# Altium PCB drive.PcbDoc
Units mm, origin at the board's own origin, x right, y up, seen from the top; angles counter-clockwise.
Board outline 29.81 x 30.08 mm, 2 copper layers (Top Layer, Bottom Layer); 44 components, 40 nets, 202 pads, 109 vias.
Unrouted connection lines stored in the file: 5.
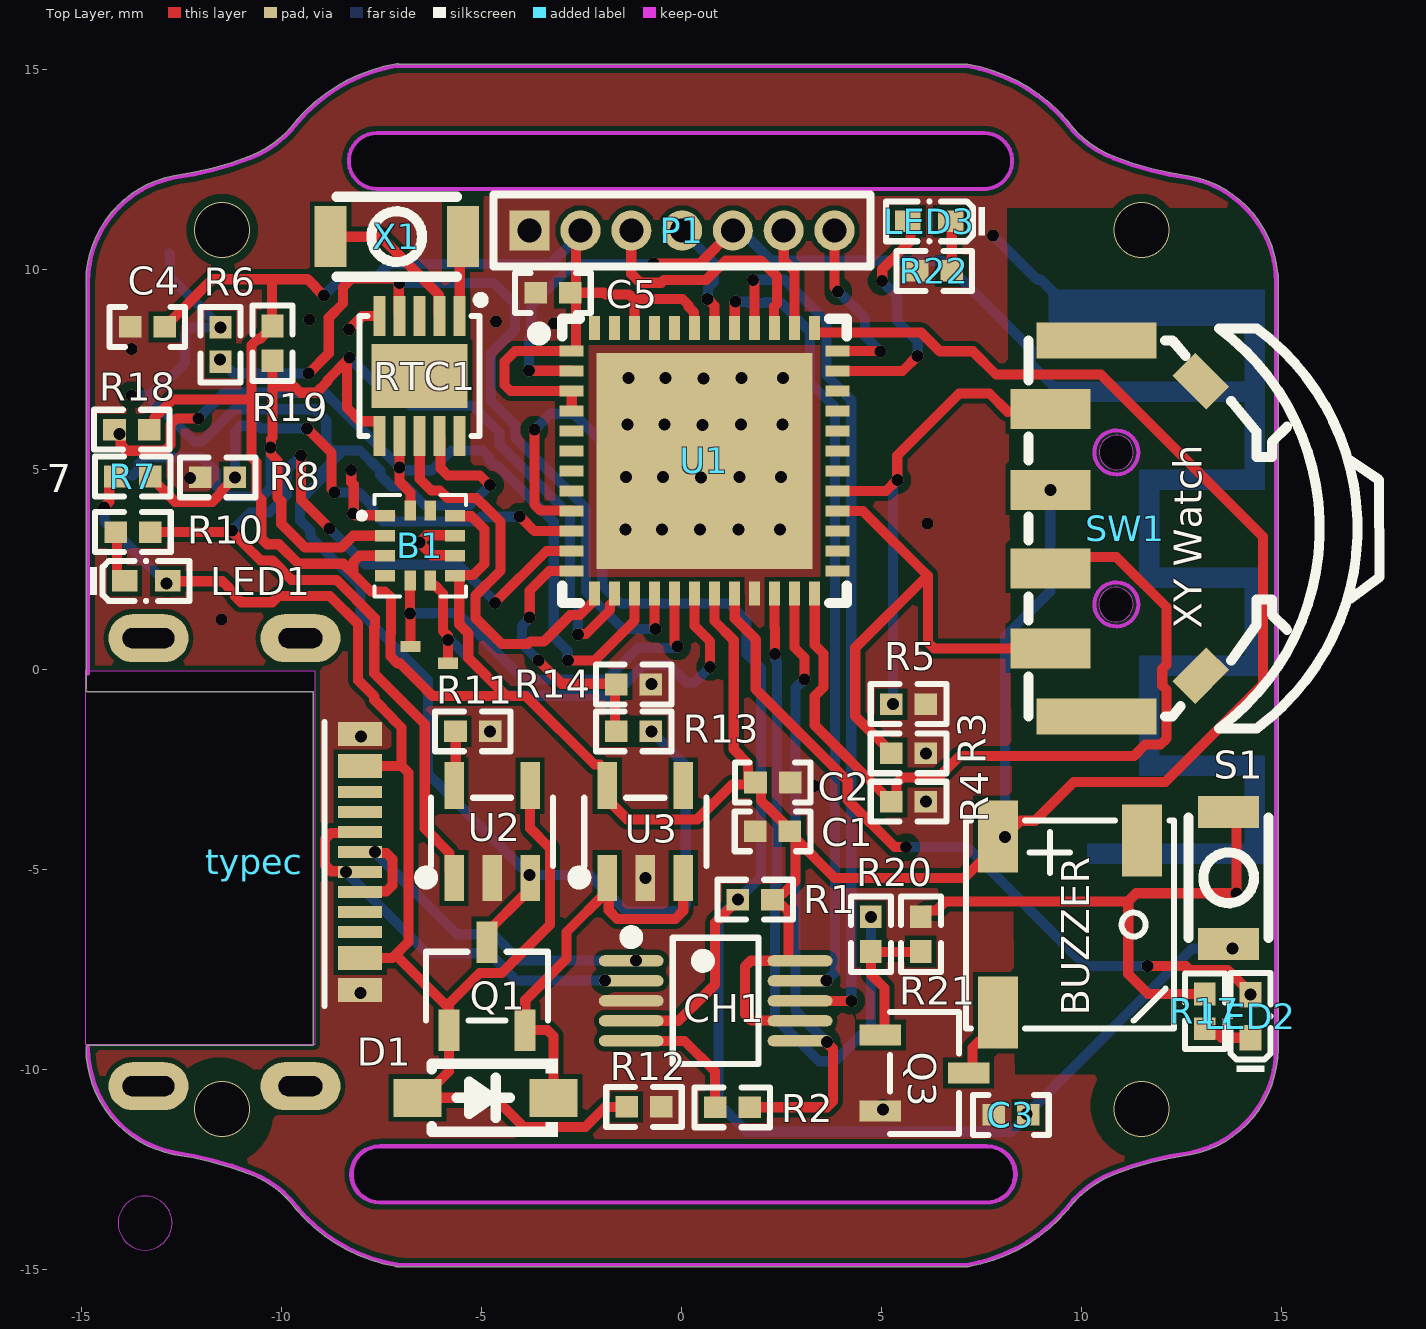
[diagram p0: Top Layer view]
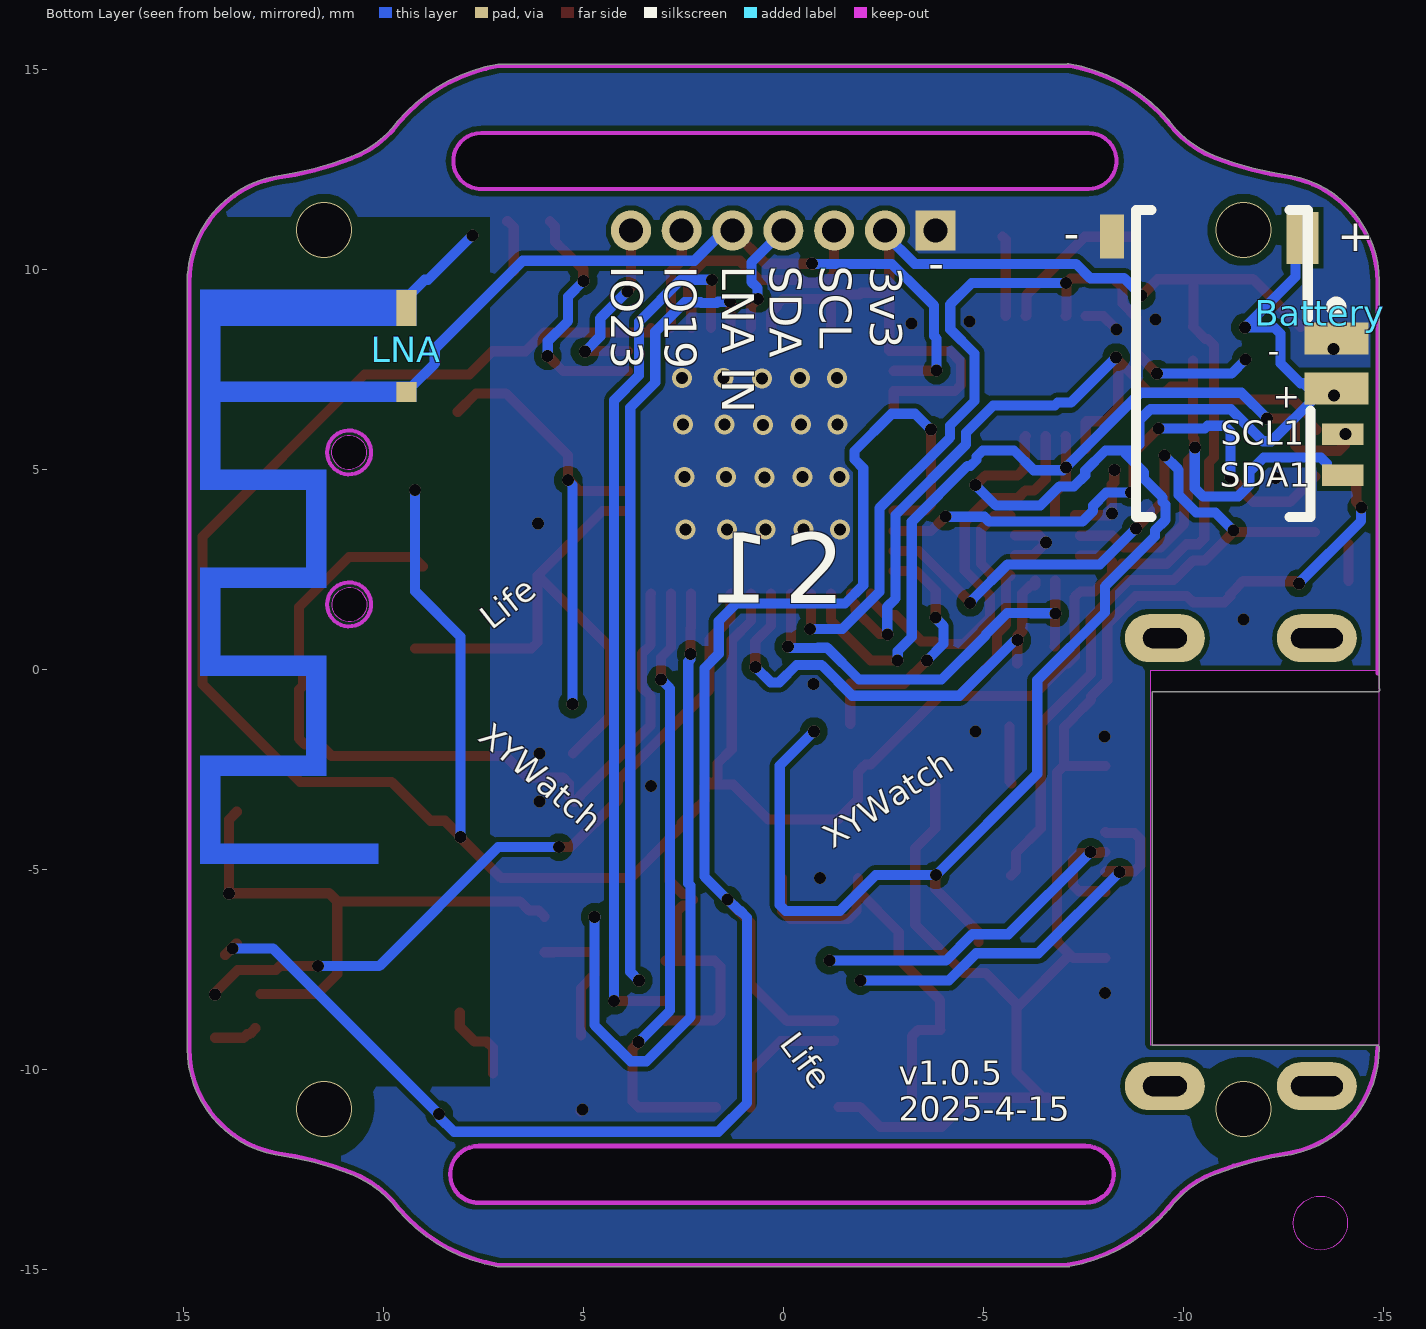
[diagram p1: Bottom Layer view, seen from below]

## Layer stack, top to bottom
Top Solder: solder mask 0.0102, Solder Resist, Dk 3.5
Top Layer: signal copper 0.0356
Dielectric 1: dielectric 0.32, FR-4, Dk 4.8
Bottom Layer: signal copper 0.0356
Bottom Solder: solder mask 0.0102, Solder Resist, Dk 3.5

## Board outline
-12.682,-12.128 cw(c-12.682,-12.128) -12.682,-12.128 cw(c-13.843,-20.451) -10.799,-12.619 ccw(c-10.78,-12.57) -10.797,-12.619 cw(c-11.691,-15.003) -9.636,-13.499 ccw(c-9.596,-13.47) -9.634,-13.503 cw(c-9.601,-13.475) -9.634,-13.502 -9.634,-13.503 ccw(c-6.425,-10.771) -7.147,-14.923 ccw(c-7.111,-14.887) -7.111,-14.938 7.132,-14.938 ccw(c7.132,-14.887) 7.157,-14.931 ccw(c6.445,-10.777) 9.649,-13.515 ccw(c9.619,-13.475) 9.659,-13.505 cw(c11.714,-15.009) 10.82,-12.624 cw(c10.828,-12.644) 10.821,-12.624 10.822,-12.624 cw(c13.866,-20.456) 12.695,-12.135 ccw(c12.696,-12.085) 12.705,-12.134 ccw(c12.199,-9.472) 14.909,-9.472 ccw(c12.411,-9.471) 14.909,-9.453 14.909,9.652 ccw(c12.199,9.67) 14.909,9.67 ccw(c12.411,9.671) 14.909,9.688 14.909,9.872 ccw(c14.859,9.872) 14.899,9.902 ccw(c12.199,9.67) 12.705,12.333 ccw(c12.696,12.283) 12.702,12.333 ccw(c12.705,12.347) 12.703,12.333 12.702,12.333 cw(c13.864,20.656) 10.819,12.824 ccw(c10.805,12.788) 10.818,12.824 cw(c11.711,15.208) 9.657,13.704 ccw(c9.618,13.676) 9.654,13.707 ccw(c6.445,10.976) 7.147,15.131 ccw(c7.132,15.083) 7.132,15.134 -7.085,15.134 ccw(c-7.115,15.093) -7.123,15.142 ccw(c-6.428,10.986) -9.637,13.717 ccw(c-9.628,13.709) -9.637,13.717 ccw(c-9.599,13.685) -9.64,13.714 cw(c-11.694,15.218) -10.8,12.834 cw(c-10.814,12.87) -10.801,12.834 -10.802,12.834 cw(c-10.786,12.795) -10.8,12.834 -10.802,12.834 cw(c-13.847,20.666) -12.685,12.343 cw(c-12.689,12.367) -12.686,12.343 -12.685,12.343 ccw(c-12.679,12.292) -12.688,12.343 ccw(c-12.181,9.68) -14.892,9.705 ccw(c-14.842,9.702) -14.892,9.702 -14.892,9.698 cw(c-13.337,9.689) -14.892,9.705 -14.892,9.698 ccw(c-12.181,9.68) -14.892,9.662 -14.892,-0.482 ccw(c-14.848,-0.507) -14.848,-0.558 -9.215,-0.558 -9.215,-9.397 -14.838,-9.397 ccw(c-14.838,-9.447) -14.889,-9.447 ccw(c-12.178,-9.465) -12.685,-12.128 ccw(c-12.676,-12.078)
cut-out: -14.09,-13.841 ccw(c-13.415,-13.841) -13.415,-14.516 ccw(c-13.415,-13.841) -12.74,-13.841 ccw(c-13.415,-13.841) -13.415,-13.166 ccw(c-13.415,-13.841)
cut-out: -7.547,-13.372 cw(c-7.547,-12.622) -7.547,-11.871 7.604,-11.871 cw(c7.604,-11.922) 7.619,-11.874 cw(c7.634,-11.922) 7.634,-11.871 cw(c7.634,-12.622) 8.385,-12.622 cw(c7.634,-12.622) 7.715,-13.368 cw(c7.694,-13.322) 7.694,-13.372
cut-out: -7.62,12.013 cw(c-7.62,12.713) -7.62,13.413 7.531,13.413 7.561,13.413 cw(c7.561,12.713) 7.561,12.013 7.621,12.013
cut-out: -14.892,-9.377 -14.892,-0.037 -9.167,-0.037 -9.167,-9.377
board region "Default Layer Stack Region": 305 vertices, not listed, extent -14.899,-14.938 14.909,15.143
board region "Default Layer Stack Region": 305 vertices, not listed, extent -14.899,-14.938 14.909,15.143
board region "Default Layer Stack Region": 305 vertices, not listed, extent -14.899,-14.938 14.909,15.143
board region "Default Layer Stack Region": 305 vertices, not listed, extent -14.899,-14.938 14.909,15.143
board region "Layer Stack Region 1": -12.682,-12.128 -12.441,-12.166 -11.963,-12.261 -11.491,-12.384 -11.027,-12.534 -10.797,-12.619 -10.627,-12.69 -10.304,-12.868 -10.01,-13.091 -9.751,-13.354 -9.634,-13.503 -9.515,-13.642 -9.255,-13.898 -8.974,-14.132 -8.673,-14.34 -8.356,-14.521 -8.024,-14.674 -7.68,-14.798 -7.327,-14.892 -7.144,-14.926 -7.126,-14.936 -7.111,-14.938 7.142,-14.937 7.157,-14.931 7.337,-14.9 7.691,-14.807 8.035,-14.684 8.368,-14.532 8.686,-14.351 8.987,-14.144 9.269,-13.911 9.53,-13.654 9.659,-13.505 9.774,-13.36 10.033,-13.097 10.327,-12.874 10.65,-12.696 10.822,-12.624 11.049,-12.539 11.51,-12.39 11.98,-12.268 12.455,-12.172 12.705,-12.134 12.936,-12.09 13.376,-11.924 13.78,-11.686 14.137,-11.381 14.436,-11.019 14.669,-10.611 14.828,-10.169 14.909,-9.706 14.909,-9.469 14.909,-9.453 14.909,9.659 14.909,9.672 14.909,9.688 14.908,9.884 14.899,9.902 14.88,10.122 14.772,10.548 14.597,10.952 14.358,11.323 14.063,11.65 13.719,11.925 13.335,12.14 12.922,12.292 12.702,12.333 12.462,12.37 11.983,12.466 11.511,12.589 11.047,12.739 10.818,12.824 10.647,12.895 10.324,13.073 10.03,13.296 9.771,13.559 9.654,13.707 9.535,13.848 9.273,14.106 8.989,14.341 8.686,14.55 8.366,14.731 8.031,14.885 7.685,15.008 7.328,15.101 7.145,15.132 7.132,15.134 -7.089,15.137 -7.108,15.143 -7.123,15.142 -7.305,15.112 -7.662,15.02 -8.01,14.896 -8.345,14.743 -8.666,14.561 -8.97,14.352 -9.255,14.117 -9.517,13.858 -9.64,13.714 -9.754,13.569 -10.013,13.306 -10.307,13.083 -10.63,12.905 -10.802,12.834 -11.03,12.749 -11.494,12.599 -11.966,12.476 -12.444,12.38 -12.688,12.343 -12.917,12.299 -13.354,12.135 -13.756,11.898 -14.112,11.597 -14.411,11.239 -14.645,10.835 -14.806,10.397 -14.89,9.938 -14.892,9.694 -14.892,9.676 -14.892,9.662 -14.899,-0.494 -14.899,-0.521 -14.885,-0.544 -14.862,-0.558 -14.848,-0.558 -9.215,-0.558 -9.215,-9.397 -14.848,-9.397 -14.867,-9.404 -14.881,-9.419 -14.889,-9.447 -14.89,-9.683 -14.812,-10.148 -14.654,-10.593 -14.422,-11.004 -14.122,-11.369 -13.764,-11.676 -13.358,-11.917 -12.917,-12.084

## Design rules (kind name [scope] priority, off if disabled: settings)
Clearance [All] p1: gap=0.127 ignorepadtopadclearanceinfootprint=FALSE except(0.15: Arc-Arc Arc-Track Track-Track; 0.2: Arc-Via Track-Via SMDPad-Via THPad-Via Via-Fill Via-Poly Via-Region; 0.4: Via-Via)
PolygonConnect [All] p1: connectstyle=Direct reliefconductorwidth=0.254 reliefentries=4 polygonreliefangle="90 Angle" airgapwidth=0.254
RoutingVias [All] p1: holewidth=0.4 width=1 viastyle="Through Hole" minholewidth=0.3 minwidth=0.6 maxholewidth=0.711 maxwidth=1.27
SolderMaskExpansion [All] p1: expansion=0.102 istentingtop=FALSE
Width [All] p1: maxlimit=3 minlimit=0.127 preferedwidth=0.254 minimp=50.000000 maximp=50.000000 favimp=50.000000
30 further rules are at their usual default settings.

## Components (designator, comment, footprint, x,y, rotation, side; value= is the part's Value field where it differs from the comment)
B1 "BMA423" LGA-12(2X2)-2 -6.65,2.963 r270 top locked
Battery "Molex 532610271" SMD,P=1.25MM -10.302,7.995 r90 bottom
BUZZER "Beep-5020" 5020BUZZER 9.71,-6.427 r180 top
C1 "104" C0402-MIN 2.22,-4.047 r0 top
C2 "105" C0402-MIN 2.33,-2.827 r180 top
C3 "104" C0402-MIN 8.18,-11.137 r0 top (schematic designator CON)
C4 "104" C0402-MIN -13.409,8.563 r0 top
C5 "104" C0402-MIN -3.27,9.413 r0 top
CH1 "CH340X" MSOP-10 0.85,-8.447 r270 top locked
D1 "MBR0530" SOD-123 -4.89,-10.747 r180 top
LED1 "RED" LED0402 -13.547,2.213 r180 top
LED2 "RED" LED0402 14.22,-8.827 r270 top
LED3 "BLUE" LED0402 6.35,11.203 r0 top
LNA "ANTENNA" SWRA117D 12.4,3.65 r90 bottom
P1 "MHDR1X7" MHDR1X7 -3.8,10.973 r0 top locked
Q1 "CJ2301" SOT-23-3 -5.03,-7.947 r270 top
Q3 "SS8050" SOT-23-3 6.04,-9.927 r180 top
R1 "10K" R0402 1.89,-5.757 r180 top
R2 "4.7K" R0402 1.32,-10.947 r180 top
R3 "10K" R0402 5.62,-2.097 r0 top
R4 "10K" R0402 5.62,-3.307 r0 top
R5 "10K" R0402 5.62,-0.867 r0 top
R6 "10K" R0402 -11.53,8.173 r270 top
R7 "51K" R0402 -13.774,4.823 r0 top
R8 "100K" R0402 -11.55,4.803 r180 top
R10 "1K" R0402 -13.77,3.433 r0 top
R11 "10K" R0402 -5.17,-1.547 r180 top
R12 "10K" R0402 -0.89,-10.937 r180 top
R13 "100K" R0402 -1.253,-1.547 r0 top
R14 "100K" R0402 -1.15,-0.377 r180 top
R17 "1K" R0402 13.08,-8.597 r90 top
R18 "4.7K" R0402 -13.8,5.993 r0 top
R19 "4.7K" R0402 -10.23,8.103 r90 top
R20 "1K" R0402 4.73,-6.567 r270 top
R21 "10K" R0402 5.98,-6.567 r270 top
R22 "1K" R0402 6.37,9.963 r180 top
RTC1 "PCF8563BS" HVSON-10-EP(3X3) -6.45,7.56 r180 top locked
S1 "SW-PB" SWITCH-2X3 13.718,-5.227 r90 top
SW1 "TM-2024A" LUNBO-min-out 12.33,3.723 r270 top locked
typec "typec-16p-new" TYPE-C-16P-NEW -11.627,-4.944 r270 top locked
U1 "esp32-pico-d4" QFN-48-EP(7X7) 0.625,5.223 r270 top locked
U2 "TP4054" SOT-23-5 -4.8,-4.197 r0 top
U3 "ME6211C33M5G-N" SOT-23-5 -0.97,-4.197 r0 top
X1 "32.768KHZ" SMD3215-2P -7.16,10.793 r0 top locked

## Footprints (in the part's own frame and the unit in brackets; to place one, negate y for a bottom-side part, rotate by r counter-clockwise, add the part's x,y. Pads: shape width x height; smd on the part's side, far side on the other; paste and mask are expansions set on the pad)
5020BUZZER [mm] "无源蜂鸣器"
  rect 1x1.8 smd: 1(1.8,-2.25) 2(1.8,2.152) 3(-1.8,-2.151)
  silkscreen extent -2.6,-2.65 2.6,2.55, body extent -2.6,-2.7 2.6,2.5, height 2
C0402-MIN [mm]
  rect 0.566x0.54 smd paste-100 mask+0.051: 1(-0.381,0) 2(0.485,0)
  silkscreen extent -0.89,-0.5 1,0.5
HVSON-10-EP(3X3) [mm] "PCF8563BS"
  rect 0.3x1 smd paste+0 mask+0.05: 1(-0.9,-1.273) 2(-0.4,-1.273) 3(0.1,-1.273) 4(0.6,-1.273) 5(1.1,-1.273) 6(1.1,1.727) 7(0.6,1.727) 8(0.1,1.727) 9(-0.4,1.727) 10(-0.9,1.727)
  rect 2.4x1.6 smd paste+0 mask+0.05: 11(0.1,0.227)
  silkscreen extent -1.52,-1.78 1.6,1.73
LED0402 [mm]
  rect 0.636x0.54 smd paste-100 mask+0.051: 1(-0.695,0) 2(0.381,0)
  silkscreen extent -1.24,-0.54 1.23,0.54
LGA-12(2X2)-2 [mm] "BMA423"
  rect 0.28x0.5 smd: 1(-0.881,-0.762) 2(-0.381,-0.762) 3(0.119,-0.762) 4(0.619,-0.762) 7(0.619,0.988) 8(0.119,0.988) 9(-0.381,0.988) 10(-0.881,0.988)
  rect 0.5x0.28 smd: 5(0.744,-0.137) 6(0.744,0.363) 11(-1.006,0.363) 12(-1.006,-0.137)
  silkscreen extent -1.4,-1.42 1.14,1.26
LUNBO-min-out [mm]
  rect 1x2 smd: 1(-2.788,-3.115) 2(3.197,-3.115) 3(-0.762,-3.115) 4(1.197,-3.115)
  rect 0.9x3 smd: 5(-4.503,-1.964) 6(4.897,-1.964)
  rect 1.2x0.8 smd rot 45: 7(-3.483,0.646)
  rect 1.2x0.8 smd rot 135: 8(3.877,0.646)
  Keep-Out Layer board cut-out: -1.274,-1.43 -1.348,-1.22 -1.517,-1.076 -1.736,-1.035 -1.945,-1.109 -2.09,-1.278 -2.13,-1.497 -2.13,-1.497 -2.056,-1.706 -1.887,-1.851 -1.669,-1.891 -1.459,-1.817 -1.315,-1.648 -1.274,-1.43
  Keep-Out Layer board cut-out: 2.529,-1.44 2.455,-1.23 2.286,-1.086 2.068,-1.045 1.858,-1.119 1.714,-1.288 1.673,-1.507 1.673,-1.507 1.747,-1.717 1.916,-1.861 2.135,-1.902 2.344,-1.827 2.489,-1.658 2.529,-1.44
  Keep-Out Layer circle w0.025: c2.097,-1.464 r0.55
  Keep-Out Layer circle w0.025: c-1.703,-1.464 r0.55
  Keep-Out Layer circle w0.1: c2.097,-1.464 r0.55
  Keep-Out Layer circle w0.1: c-1.703,-1.464 r0.55
  silkscreen extent -4.8,-3.66 5.2,5.12
MHDR1X7 [mm]
  rect 1x1 hole 0.6: 1(0,0)
  round 1 hole 0.6: 2(1.27,0) 3(2.54,0) 4(3.81,0) 5(5.08,0) 6(6.35,0) 7(7.62,0)
  silkscreen extent -0.9,-0.9 8.52,0.9
MSOP-10 [mm] "CH340x"
  oval 0.28x1.62 smd: 1(-1.163,-2.111) 2(-0.662,-2.111) 3(-0.163,-2.111) 4(0.338,-2.111) 5(0.837,-2.111) 6(0.837,2.109) 7(0.338,2.109) 8(-0.163,2.109) 9(-0.662,2.109) 10(-1.163,2.109)
  silkscreen extent -1.9,-2.26 1.41,1.07
QFN-48-EP(7X7) [mm] "esp32-pico-d4"
  rect 0.27x0.6 smd paste-100 mask+0.051: 1(-2.74,-3.375) 2(-2.24,-3.375) 3(-1.74,-3.375) 4(-1.24,-3.375) 5(-0.74,-3.375) 6(-0.24,-3.375) 7(0.26,-3.375) 8(0.76,-3.375) 9(1.26,-3.375) 10(1.76,-3.375) 11(2.26,-3.375) 12(2.76,-3.375) 25(2.76,3.266) 26(2.26,3.266) 27(1.76,3.266) 28(1.26,3.266) 29(0.76,3.266) 30(0.26,3.266) 31(-0.24,3.266) 32(-0.74,3.266) 33(-1.24,3.266) 34(-1.74,3.266) 35(-2.24,3.266) 36(-2.74,3.266)
  rect 0.6x0.27 smd paste-100 mask+0.051: 13(3.33,-2.805) 14(3.33,-2.304) 15(3.33,-1.805) 16(3.33,-1.304) 17(3.33,-0.805) 18(3.33,-0.304) 19(3.33,0.195) 20(3.33,0.696) 21(3.33,1.195) 22(3.33,1.696) 23(3.33,2.195) 24(3.33,2.696) 37(-3.31,2.696) 38(-3.31,2.195) 39(-3.31,1.696) 40(-3.31,1.195) 41(-3.31,0.696) 42(-3.31,0.195) 43(-3.31,-0.304) 44(-3.31,-0.805) 45(-3.31,-1.304) 46(-3.31,-1.805) 47(-3.31,-2.304) 48(-3.31,-2.805)
  rect 5.4x5.4 smd paste-100 mask+0.051: 49(0.01,-0.054)
  silkscreen extent -3.55,-4.34 3.57,3.5
R0402 [mm]
  rect 0.566x0.54 smd paste-100 mask+0.051: 1(-0.381,0) 2(0.485,0)
  silkscreen extent -0.89,-0.5 1,0.5
SMD3215-2P [mm]
  rect 0.8x1.524 smd: 1(-1.613,0.026) 2(1.688,0.026)
  silkscreen extent -1.46,-0.97 1.54,1.03
SMD,P=1.25MM [mm] "Molex 532610271"
  rect 0.8x1.6 smd: 1(0.278,-3.518) 2(-0.972,-3.518)
  rect 1.3x0.8 smd: 3(2.794,-2.667)
  silkscreen extent -4.19,-3.63 3.49,1.49
SOD-123 [mm] "MBR0530"
  rect 1.2x0.95 smd: 1(-1.686,-0.039) 2(1.714,-0.039)
  silkscreen extent -1.79,-1.02 1.36,0.94
SOT-23-3 [mm] "CJ2301 P-MOS, S8050 三极管"
  rect 1.037x0.532 smd: 1(1.07,-0.787) 2(1.07,1.113) 3(-1.132,0.163)
  silkscreen extent -0.89,-1.36 0.83,1.69
SOT-23-5 [mm] "TP4054,ME6211C33M5G-N"
  rect 0.49x1.157 smd: 1(-0.889,-1.016) 2(0.061,-1.016) 3(1.011,-1.016)
  rect 0.49x1.175 smd: 4(1.011,1.291) 5(-0.889,1.291)
  silkscreen extent -1.74,-1.16 1.59,0.99
SWITCH-2X3 [mm]
  rect 0.8x1.524 smd: 1(-1.632,0.044) 2(1.669,0.044)
  silkscreen extent -1.48,-0.96 1.52,1.04
SWRA117D [mm] "天线"
  rect 0.5x0.5 smd paste+0 mask+0.051: 1(3.288,-2.967)
  rect 0.9x0.5 smd paste+0 mask+0.051: 2(5.388,-2.967)
  Top Layer region: -8.012,1.683 -8.012,-2.257 -8.512,-2.257 -8.512,1.683
  Top Layer region: -5.812,2.183 -5.812,1.683 -8.512,1.683 -8.512,2.183
  Top Layer region: -5.812,1.683 -5.812,-0.957 -6.312,-0.957 -6.312,1.683
  Top Layer region: -3.812,-0.457 -3.812,-0.957 -5.812,-0.957 -5.812,-0.457
  Top Layer region: -3.312,1.683 -3.312,-0.957 -3.812,-0.957 -3.812,1.683
  Top Layer region: -1.112,2.183 -1.112,1.683 -3.812,1.683 -3.812,2.183
  Top Layer region: -1.112,1.683 -1.112,-0.957 -1.612,-0.957 -1.612,1.683
  Top Layer region: 0.838,-0.457 0.838,-0.957 -1.162,-0.957 -1.162,-0.457
  Top Layer region: 1.338,1.683 1.338,-0.957 0.838,-0.957 0.838,1.683
  Top Layer region: 5.838,2.183 5.838,1.683 0.838,1.683 0.838,2.183
  Top Layer region: 5.838,1.683 5.838,-3.217 4.938,-3.217 4.938,1.683
  Top Layer region: 3.538,1.683 3.538,-3.217 3.038,-3.217 3.038,1.683
TYPE-C-16P-NEW [mm]
  rect 0.6x1.1 smd paste-100 mask+0.05: 1(-3.327,3.59) 2(-2.527,3.59) 11(2.273,3.59) 12(3.073,3.59)
  rect 0.3x1.1 smd paste-100 mask+0.05: 3(-1.877,3.59) 4(-1.377,3.59) 5(-0.877,3.59) 6(-0.377,3.59) 7(0.123,3.59) 8(0.623,3.59) 9(1.123,3.59) 10(1.623,3.59)
  oval 1.2x2 hole 0.5 slot 1.1 at 90 deg: 13(-5.727,2.097) 14(5.473,2.097)
  oval 1.2x2 hole 0.5 slot 1.3 at 90 deg: 15(-5.727,-1.703) 16(5.473,-1.703)
  silkscreen extent -3.63,2.7 3.47,2.7, body extent -5.83,-3.5 5.57,3.05, height 1.59

## Part data
Battery: library part smd1.25
BUZZER: "贴片蜂鸣器5020最小封装"
C1 C2 C3 C4 C5: library part C, "无极性贴片电容", BOM名称=无极性贴片电容, 学习资源=www.ooocke.com, 版权归属=源创客
  C2 C3 C4 C5: 材质=X7R
D1: library part MBR0530T1G
LED1 LED2 LED3: library part LED-SMD, "贴片LED", BOM名称=贴片LED, 学习资源=www.ooocke.com, 版权归属=源创客
P1: "Header, 7-Pin", LatestRevisionDate=17-Jul-2002, LatestRevisionNote="Re-released for DXP Platform.", Publisher="Altium Limited"
Q3: library part 8050-SMD, "高频放大-NPN型", BOM名称=高频放大-NPN型, 学习资源=www.ooocke.com, 属性="40V 1.5A 1W 100MHZ", 版权归属=源创客
R1 R2 R3 R4 R5 R6 R7 R8 R10 R11 R12 R13 R14 R17 R18 R19 R20 R21 R22: library part R, "贴片电阻", BOM名称=贴片电阻, 学习资源=www.ooocke.com, 版权归属=源创客
S1: "Switch", LatestRevisionDate=17-Jul-2002, LatestRevisionNote="Re-released for DXP Platform.", PackageDescription="Switch; 2 Leads", PackageReference=SPST-2, Published=24-Mar-1999, Publisher="Altium Limited"
SW1: library part lunbo-min, JLCPCB Part Class="Extended Part", LCSC Part Name=四脚两档拨轮开关TM-2024A, Manufacturer="XKB Connection(中国星坤)", Add into BOM=yes, Convert to PCB=yes, Datasheet=https://atta.szlcsc.com/upload/public/pdf/source/20211011/7A4DB3DC37E7D5823B6D92C66ED3191E.pdf, Device=TM-2024A, Manufacturer Part=TM-2024A, Supplier=LCSC, Supplier Footprint=SMD, Supplier Part=C561480, Symbol=TM-2024A
X1: library part XTAL-2P, "2脚无源脚晶振", BOM名称=2脚无源脚晶振, 学习资源=www.ooocke.com, 版权归属=源创客, 负载电容=CL20pF

## Free pads (board coordinates)
  rect 0.6x1.1 smd far side paste-100 mask+0.05: 2(-8.21,10.823)
  rect 1.037x0.532 smd far side: 3(-13.97,4.853) 3(-13.97,5.883)
  rect 0.5x0.28 smd: 3(-6.777,0.575) 3(-5.84,0.153)

## Via types
v1: diameter 0.3, hole 0.3, Top Layer to Bottom Layer, 85 vias
v2: diameter 0.5, hole 0.3, Top Layer to Bottom Layer, 20 vias
v3: diameter 1.4, hole 1.35, Top Layer to Bottom Layer, 4 vias

## Nets (pads, with @x,y where several pads share a name; then routed paths per layer and width w, separated by ;. In a path a pad name is that pad's centre, name@x,y a point inside that pad or via, vN(x,y) a via of type N, cw(c..) or ccw(c..) an arc to the next point about the centre after c; other vN are vias at no path point)
32KHZ: RTC1.8 U1.13 | length 10.1
  Top Layer w0.254: RTC1.8 -6.55,4.763 -6.26,4.473 -6.042,4.473 -5.851,4.282 -5.135,4.282 -4.988,4.135 -4.974,4.135 -4.526,3.687 -4.526,2.476 -5.157,1.845 -5.157,1.293 -4.499,0.635 -3.843,0.635 -3.777,0.701 -3.44,0.701 -2.787,1.353 -2.782,1.353 -2.774,1.361 -2.547,1.361 -2.18,1.728 U1.13
+3.3V: B1.3 B1.7 B1.10 BUZZER.1 C1.2 C2.2 C4.2 C5.2 CH1.7 CH1.10 P1.2 R1.1 R18.2 R19.2 SW1.3 U1.1 U1.3 U1.4 U1.19 U1.37 U1.43 U1.46 U3.5 | length 112.5
  Top Layer w0.254: R18.2 -13.182,6.126 -13.182,6.292 -12.724,6.75 -10.799,6.75 -10.754,6.705 ; C4.2 -11.734,9.753 -9.351,9.753 v1(-8.945,9.346) ; R19.2@-10.245,8.603 -10.245,9.613 ; R19.2 -10.23,8.575 -10.546,8.259 -10.605,8.259 -10.754,8.11 -10.754,6.705 ; B1.3 -8.056,2.844 -8.205,2.696 -8.205,2.388 ; B1.7 -5.649,2.357 -5.216,2.357 -4.93,2.643 -4.93,3.505 -5.256,3.831 -5.649,3.831 B1.10 ; B1.7@-5.561,2.353 -5.561,1.126 -5.336,0.901 -5.336,0.289 -4.38,-0.666 ; U1.4 U1.3 -4.28,6.963 -4.429,7.112 -4.429,7.694 -4.16,7.963 U1.1 -2.648,7.963 -2.64,7.971 C5.2@-2.64,9.417 ; P1.2 -2.64,10.863 C5.2@-2.64,9.417 ; U3.5@-2.044,-2.378 -2.179,-2.378 -3.89,-0.666 -4.38,-0.666 ; U3.5@-1.977,-2.445 -1.859,-2.563 U3.5 -1.859,-3.248 -1.36,-3.747 0.391,-3.747 1.259,-2.879 1.805,-2.879 1.656,-2.73 1.656,-2.352 1.3,-1.997 1.3,0.733 0.82,1.213 U1.19 ; U1.46 -1.18,9.262 ; U1.43 0.312,8.541 0.312,8.923 0.169,9.066 0.169,9.113 0.02,9.262 -1.18,9.262 ; C2.2@1.886,-2.817 1.98,-2.911 1.98,-3.276 2.227,-3.523 ; 2.227,-3.523 2.376,-3.672 2.549,-3.845 2.549,-3.904 2.688,-4.043 C1.2@2.848,-4.203 ; CH1.7 2.954,-8.779 1.743,-8.779 1.58,-8.617 1.58,-7.433 1.729,-7.284 CH1.10@2.682,-7.284 ; CH1.10 CH1.10@2.682,-7.284 ; U1.37 3.32,8.428 3.328,8.42 4.693,8.42 5.988,8.42 6.455,7.953 7.28,7.953 7.86,7.373 10.479,7.373 14.532,3.321 14.532,-0.368 12.088,-2.812 9.803,-2.812 8.832,-3.783 8.473,-3.783 8.1,-4.156 8.1,-4.177 v1(8.085,-4.191) 7.06,-5.217 3.833,-5.217 2.848,-4.232 2.848,-5.289 2.523,-5.614 2.414,-5.614 R1.1 2.414,-5.9 2.521,-5.9 2.67,-6.049 2.67,-7.272 CH1.10@2.682,-7.284 ; -10.754,6.705 -10.754,5.3 -10.632,5.178 -10.632,4.371 -10.512,4.251 -10.512,3.28 -10.363,3.131 -10.07,3.131 -9.58,2.641 -8.458,2.641 -8.205,2.388 ; -8.205,2.388 -7.767,1.95 -7.416,1.95 -7.267,1.801 -7.267,0.897 -7.281,0.883 -7.281,0.329 -7.107,0.156 -7.044,0.156 -6.588,-0.299 -6.221,-0.666 -4.38,-0.666 ; C5.2@-2.64,9.417 -1.938,9.417 -1.899,9.378 -1.32,9.378 -1.204,9.262 -1.18,9.262
  Bottom Layer w0.254: v1(-8.945,9.346) -8.51,9.781 -7.666,9.781 -7.307,10.14 -3.273,10.14 -2.53,10.884 P1.2 ; v1@8.085,-4.177 8.085,0.824 9.215,1.954 v1(9.215,4.485)
+5: D1.2 LED1.1 Q1.1 R7.1 R12.2 typec.2 typec.11 U2.4 | length 36.8
  Top Layer w0.254: v1(-14.441,4.053) -14.441,4.066 -14.311,4.196 -14.311,4.68 -14.168,4.823 R7.1 ; LED1.1@-12.793,2.203 -11.491,2.203 ; -11.478,2.203 -11.335,2.06 -11.335,2.047 -11.162,1.874 -11.162,1.828 -11.013,1.679 -10.237,1.679 -10.083,1.833 -8.793,1.833 -8.089,1.129 -8.089,-0.269 -7.685,-0.673 -7.685,-0.76 -7.232,-1.212 -7.232,-1.224 -7.004,-1.453 -7.004,-2.417 typec.2 ; typec.11 -7.236,-7.217 -6.828,-6.81 -6.828,-2.579 -6.99,-2.417 ; -7.153,-7.134 -5.875,-8.412 ; D1.2 D1.2@-6.479,-10.708 ; U2.4 -3.789,-3.97 -3.29,-4.469 -3.29,-6.381 -4.496,-7.587 -5.05,-7.587 -5.817,-8.354 -5.817,-10.046 D1.2@-6.479,-10.708 ; R12.2 -1.909,-10.937 -2.409,-11.437 -3.95,-11.437 -4.679,-10.708 D1.2@-6.479,-10.708
  Bottom Layer w0.254: v1(-14.441,4.053) -14.433,4.044 -14.433,3.708 v1(-12.879,2.153)
ACC_INT_1: B1.5 pad.3@-6.777,0.575 U1.17 | length 10.7
  Top Layer w0.254: B1.5 -6.788,2.217 -6.788,1.405 v1(-6.79,1.403) -6.783,1.397 -6.783,0.581 pad.3@-6.777,0.575 ; U1.17 -0.18,0.657 -0.11,0.588 v1(-0.11,0.576)
  Bottom Layer w0.254: v1(-6.79,1.403) -6.189,1.403 -6.179,1.413 -5.59,1.413 -5.056,0.879 -5.056,0.858 -3.945,-0.253 -1.881,-0.253 -1.085,0.543 -0.861,0.543 -0.854,0.536 -0.182,0.536 -0.166,0.553 -0.146,0.553 v1@-0.117,0.582
ACC_INT_2: B1.6 pad.3@-5.84,0.153 U1.18 | length 12
  Top Layer w0.254: B1.6 -6.287,2.109 -6.274,2.096 -6.164,2.096 -5.965,1.897 -5.965,0.959 -5.849,0.843 -5.849,0.739 v1(-5.84,0.731) pad.3@-5.84,0.153 ; U1.18 0.32,1.093 0.71,0.703 v1(0.71,0.063)
  Bottom Layer w0.254: v1@-5.747,0.7 -4.39,-0.657 -1.713,-0.657 -0.946,0.11 -0.32,0.11 0.114,-0.323 0.324,-0.323 v1(0.71,0.063)
ADC: R13.1 R14.2 U1.12 | length 6.4
  Top Layer w0.254: v1(-3.8,1.293) -3.8,1.973 -3.31,2.463 U1.12 ; v1(-3.58,0.224) -2.999,-0.357 R14.2@-1.667,-0.357 ; R13.1@-1.664,-1.359 R14.2@-1.664,-0.357
  Bottom Layer w0.254: v1(-3.8,1.293) -3.8,1.281 -3.991,1.09 -3.991,0.635 v1(-3.58,0.224)
beep: R20.1 U1.22 | length 16.6
  Top Layer w0.254: U1.22 2.32,1.046 2.33,1.037 v1(2.33,0.388)
  Bottom Layer w0.254: v1(2.33,0.388) 2.339,0.379 2.339,0.246 2.386,0.198 2.386,-5.347 2.331,-5.403 2.331,-8.692 3.433,-9.794 3.828,-9.794 4.73,-8.891 4.73,-6.207 v1@4.709,-6.186
  other v1: 4.73,-6.186
CHARGE_STAT: R10.2 U1.11 U2.1 | length 26.2
  Top Layer w0.254: R10.2@-13.279,3.439 v1@-11.205,3.439 ; v1(-11.239,3.473) -11.23,3.464 -11.23,3.427 -10.916,3.113 -10.53,2.727 -10.237,2.727 -9.747,2.237 -8.625,2.237 -7.671,1.283 -7.671,1.064 -7.685,1.05 -7.685,-0.102 -6.591,-1.195 -6.424,-1.362 -6.424,-3.972 -5.807,-4.59 -5.807,-5.035 U2.1@-5.689,-5.153 ; v1(-9.519,5.344) -9.519,4.239 v1(-8.802,3.522) ; v1(-4.662,1.665) -4.653,1.674 -4.653,1.691 -3.381,2.963 U1.11
  Bottom Layer w0.254: v1(-11.239,3.473) -10.79,3.922 -10.311,3.922 -9.873,4.36 -9.873,4.99 v1@-9.504,5.359 ; v1(-8.802,3.522) -7.908,2.628 -5.597,2.628 -4.73,1.761 -4.73,1.746 -4.662,1.678 v1(-4.662,1.665)
EN: C3.2 CH1.4 R1.2 S1.1 U1.9 | length 45.7
  Top Layer w0.254: v1(-3.68,5.993) -3.68,4.12 -3.531,3.971 -2.758,3.971 U1.9 ; CH1.4 -0.078,-8.784 0.552,-8.154 0.836,-7.871 0.836,-6.326 1.25,-5.913 1.25,-5.9 1.393,-5.757 v1(1.406,-5.757) ; S1.1 13.687,-6.859 S1.1@13.96,-7.132
  Bottom Layer w0.254: v1(-3.68,5.993) -3.28,6.393 -2.7,6.393 -1.768,5.461 -1.768,5.251 -1.987,5.032 -1.987,2.105 -1.53,1.648 1.186,1.648 1.623,1.21 1.623,0.39 1.982,0.031 1.982,-5.18 v1(1.406,-5.757) 1.393,-5.757 1.128,-6.022 1.1,-6.022 0.92,-6.202 0.92,-10.842 1.635,-11.557 8.245,-11.557 8.609,-11.193 8.609,-11.136 v1@8.615,-11.13 ; v1@8.639,-11.106 12.772,-6.973 v1(13.777,-6.973)
  other v1: 8.618,-11.115
GND: B1.1 B1.8 B1.9 Battery.1 C1.1 C2.1 C3.1 C4.1 C5.1 CH1.3 LNA.2 P1.1 pad.2 Q3.2 R3.2 R4.2 R5.2 R8.2 R11.1 R12.1 R14.1 R17.2 R21.1 R22.2 RTC1.5 S1.2 typec.1 typec.12 U1.21 U1.49 U2.2 U3.2 | length 21.6
  Top Layer w0.254: v1(-8.319,8.503) -7.989,8.833 RTC1.5 ; v1(-8.27,4.99) -8.261,4.981 -8.261,4.679 -8.2,4.617 -8.2,3.921 -8.211,3.91 v1(-8.211,3.897) -8.198,3.897 -8.154,3.853 B1.1@-7.28,3.853 ; B1.8@-5.78,2.853 -6.24,2.853 v1(-6.56,3.173) -6.38,3.353 B1.9@-5.78,3.353 ; v1(5.027,-10.995) Q3.2@5.082,-11.05 ; R21.1 5.98,-6.173 6.123,-6.03 6.363,-6.03 6.595,-5.798 11.163,-5.798 ; R17.2 11.661,-8.112 11.163,-7.614 11.163,-5.798 ; S1.2 13.87,-3.754 v1(13.87,-5.597) 11.364,-5.597 11.163,-5.798
  Bottom Layer w0.254: v1(7.78,10.853) 8.892,9.742 8.978,9.742 LNA.2@9.66,9.06
  other v1: -8.03,-8.092 -0.909,-5.213 6.105,-3.307 3.32,-2.917 6.105,-2.097 -8.022,-1.674 -4.789,-1.547 -0.749,-0.367 -11.5,1.243 6.14,3.643 -12.289,4.789 -13.75,8.013 -3.19,8.653 -4.64,8.703 -9.3,8.743
  other v2: -1.41,3.503 -0.49,3.503 0.46,3.493 1.42,3.503 2.459,3.503 0.48,4.803 -1.39,4.813 -0.47,4.813 1.44,4.813 2.479,4.813 -1.35,6.123 -0.43,6.123 0.52,6.113 1.48,6.123 2.519,6.123 -1.33,7.283 -0.41,7.283 0.54,7.273 1.5,7.283 2.539,7.283
IO0: CH1.6 R2.1 U1.23 | length 15.4
  Top Layer w0.254: R2.1 3.631,-10.947 3.78,-10.798 3.78,-10.037 3.78,-9.479 3.63,-9.329 v1(3.63,-9.317) CH1.6@3.639,-9.326 ; U1.23 2.82,0.549 3.07,0.299 v1(3.07,-0.247) ; CH1.6@3.639,-9.32 CH1.6@3.643,-9.317
  Bottom Layer w0.254: v1(3.07,-0.247) 2.843,-0.474 2.843,-8.53 v1(3.63,-9.317)
IO13: LED2.1 U1.20 | length 18.4
  Top Layer w0.254: U1.20 1.328,1.885 1.328,1.276 1.853,0.752 1.853,-0.492 4.15,-2.789 4.15,-3.267 5.323,-4.44 v1(5.614,-4.44) ; v1(11.64,-7.417) 12.603,-7.417 12.699,-7.513 13.65,-7.513 14.22,-8.083 v1(14.22,-8.131)
  Bottom Layer w0.254: v1(5.614,-4.44) 7.139,-4.44 10.116,-7.417 v1(11.64,-7.417)
IO18: LED3.1 U1.35 | length 6.3
  Top Layer w0.254: U1.35 5.519,7.463 5.889,7.833 v1(5.9,7.833) ; v1(5.005,9.711) 5.014,9.72 5.014,10.004 5.498,10.487 5.504,10.487 5.722,10.705 5.722,11.083 LED3.1@5.842,11.203
  Bottom Layer w0.254: v1(5.005,9.711) 5.39,9.326 5.39,8.713 5.9,8.203 v1(5.9,7.833)
IO19: P1.6 U1.38 | length 2.6
  Top Layer w0.254: P1.6 2.55,10.227 2.82,9.957 U1.38
IO23: P1.7 U1.36 | length 4.6
  Top Layer w0.254: P1.7 3.82,9.556 3.912,9.465 v1(3.912,9.452) ; U1.36 4.938,7.963 4.958,7.943 v1(4.97,7.943)
  Bottom Layer w0.254: v1(3.912,9.452) 4.587,8.777 4.587,8.326 v1(4.97,7.943)
LNA_IN: LNA.1 P1.5 U1.2 | length 18.8
  Top Layer w0.254: v1(-3.82,7.473) -3.815,7.468 -2.755,7.468 U1.2 ; v1@-0.73,10.117 -0.703,10.144 0.451,10.144 P1.5 P1.5@1.078,10.973
  Bottom Layer w0.254: v1(-3.82,7.473) -3.82,8.277 -3.759,8.338 -3.759,9.094 -3.117,9.736 -3.106,9.736 -2.708,10.134 -0.718,10.134 v1(-0.709,10.143) ; P1.5 1.482,10.973 1.749,10.706 1.751,10.706 2.238,10.219 6.524,10.219 8.725,8.018 8.725,7.646 9.31,7.061 LNA.1
MCU_RXD: CH1.8 U1.40 | length 22
  Top Layer w0.254: v1(1.789,9.742) 1.789,9.73 1.82,9.699 U1.40 ; CH1.8 2.96,-8.286 4.226,-8.286 4.239,-8.286 v1(4.24,-8.287)
  Bottom Layer w0.254: v1(1.789,9.742) 2.571,9.742 3.62,8.693 3.62,7.353 4.24,6.733 v1(4.24,-8.287)
MCU_TXD: CH1.9 U1.41 | length 19.4
  Top Layer w0.254: U1.41 1.328,8.541 1.328,9.176 1.343,9.19 v1(1.343,9.203)
  Bottom Layer w0.254: v1(1.343,9.203) 1.352,9.194 1.638,9.194 1.673,9.159 2.068,9.159 2.087,9.178 2.475,9.178 3.21,8.443 3.21,7.173 3.836,6.547 3.836,-7.561 v1(3.623,-7.774)
NetBUZZER_2: BUZZER.2 Q3.3 | length 2
  Top Layer w0.254: Q3.3@7.272,-10.1 7.272,-9.453 7.421,-9.304 7.727,-9.304 8.1,-8.931 BUZZER.2@8.1,-8.579
NetCH1_5: CH1.5 R2.2 | length 3.3
  Top Layer w0.254: CH1.5 -1.256,-9.289 0.073,-9.289 0.836,-10.052 R2.2
NetD1_1: D1.1 Q1.2 U3.1 U3.3 | length 10.3
  Top Layer w0.254: D1.1 -3.204,-9.166 -3.353,-9.017 Q1.2 -3.909,-9.01 -3.909,-8.266 -2.877,-7.234 -2.877,-6.565 U3.1@-1.859,-5.546 ; U3.1 U3.1@-1.859,-5.546 ; U3.3 0.041,-6.036 -0.16,-6.237 -1.61,-6.237 -1.823,-6.024 -1.823,-5.582 U3.1@-1.859,-5.546
NetLED1_2: LED1.2 R10.1 | length 0.9
  Top Layer w0.254: LED1.2@-14.115,2.213 -14.115,3.139
NetLED2_2: LED2.2 R17.1 | length 1.1
  Top Layer w0.254: R17.1@13.21,-8.968 13.21,-8.974 13.353,-9.117 13.412,-9.117 13.502,-9.208 LED2.2
NetLED3_2: LED3.2 R22.1 | length 1.3
  Top Layer w0.254: R22.1 6.751,11.06 6.894,11.203 LED3.2@6.919,11.203
NetQ3_1: Q3.1 R20.2 R21.2 | length 3.5
  Top Layer w0.254: Q3.1@5.07,-9.15 5.07,-7.962 4.73,-7.623 R20.2 4.74,-7.061 5.75,-7.061 5.76,-7.071 R21.2@5.98,-7.071
NetR11_2: R11.2 U2.5 | length 1.4
  Top Layer w0.254: U2.5@-5.689,-2.845 -5.647,-2.803 R11.2@-5.647,-1.427
NetRTC1_1: RTC1.1 X1.2 | length 2
  Top Layer w0.254: RTC1.1 -5.55,10.741 X1.2
NetRTC1_2: RTC1.2 X1.1 | length 3.8
  Top Layer w0.254: X1.1 -7.526,10.819 -6.073,9.365 -6.073,8.856 RTC1.2
RTC_INT: R6.2 RTC1.4 U1.16 | length 21.8
  Top Layer w0.254: v1(-9.33,7.396) -8.823,7.903 -8.823,8.794 -8.468,9.149 -8.468,9.555 -8.253,9.77 -7.176,9.77 -7.078,9.672 -7.073,9.678 -7.073,8.856 RTC1.4 ; U1.16 -0.68,1.049 -0.657,1.026 v1(-0.657,1.013)
  Bottom Layer w0.254: v1(-11.545,7.748) -11.193,7.396 v1(-9.33,7.396) ; v1(-7.057,9.663) -4.7,9.663 -4.163,9.126 -4.163,8.506 -4.77,7.899 -4.77,6.713 -4.157,6.1 -4.157,5.796 -2.391,4.03 -2.391,1.937 -1.467,1.013 v1(-0.657,1.013)
SCL1: B1.12 pad.3@-13.97,5.883 R18.1 RTC1.7 U1.15 | length 22.3
  Top Layer w0.254: v1(-14.05,5.883) -14.025,5.858 -14.025,5.618 -13.876,5.469 -12.927,5.469 -12.778,5.618 -12.778,6.124 -12.63,6.273 v1(-12.085,6.273) ; v1(-7.06,5.054) -7.051,5.045 -7.051,4.693 -6.78,4.422 B1.12@-6.78,3.853 ; v1@-7.05,5.054 -7.055,5.059 -7.055,5.828 RTC1.7 ; v1(-2.844,0.224) -2.176,0.224 -1.18,1.22 U1.15
  Bottom Layer w0.254: v1(-12.085,6.273) -11.439,6.919 -8.917,6.919 -7.06,5.062 v1(-7.06,5.054) ; v1@-7.056,5.058 -7.052,5.058 -6.975,4.981 -6.248,4.981 -5.755,5.473 -4.977,5.473 -4.82,5.316 -4.82,5.238 -4.671,5.089 -4.593,5.089 -3.199,3.695 -3.199,0.811 -2.85,0.462 v1@-2.85,0.23
SCL_OLED: P1.3 U1.39 | length 6.5
  Top Layer w0.254: P1.3 -1.26,9.889 -1.037,9.666 -0.512,9.666 -0.437,9.74 0.619,9.74 1.098,10.219 1.987,10.219 2.387,9.819 2.387,9.148 2.312,9.073 2.312,8.541 U1.39
SDA1: B1.2 pad.3@-13.97,4.853 R19.1 RTC1.6 U1.14 | length 30
  Top Layer w0.254: v1@-10.289,5.55 -10.268,5.529 -10.268,5.386 -10.108,5.225 -10.108,4.305 -10.01,4.207 -10.01,3.643 -9.412,3.045 -8.51,3.045 -8.211,3.344 B1.2 ; v1(-10.277,5.55) -10.268,5.559 -10.268,5.765 -10.23,5.803 -10.23,7.073 ; R19.1 -10.23,7.073 ; v1@-8.364,7.726 -8.364,6.536 -8.034,6.206 -7.573,6.206 -7.55,6.183 RTC1.6@-7.55,5.516 ; v1(-8.31,7.803) -8.31,7.791 -8.333,7.768 -8.333,7.757 -8.853,7.237 -8.853,7.199 -9.132,6.919 -9.527,6.919 -9.681,7.073 -10.23,7.073 ; v1(-2.59,0.876) -2.581,0.885 -2.393,0.885 -1.791,1.488 -1.791,1.617 -1.68,1.728 U1.14
  Bottom Layer w0.254: pad.3@-13.97,4.853 -13.717,4.853 -13.578,4.992 -13.578,5.151 -13.429,5.3 -12.002,5.3 -11.646,4.943 -11.646,4.606 -11.366,4.326 -10.478,4.326 -10.277,4.528 v1(-10.277,5.55) ; v1(-8.31,7.803) -7.177,6.67 -6.852,6.67 -6.779,6.597 -5.234,6.597 -4.561,5.924 -4.561,5.628 -2.795,3.862 -2.795,1.77 -2.59,1.565 v1(-2.59,0.876)
SDA_OLED: P1.4 U1.42 | length 2.9
  Top Layer w0.254: v1(0.646,9.264) 0.65,9.264 0.82,9.094 U1.42
  Bottom Layer w0.254: P1.4 0.808,10.175 0.808,9.693 0.655,9.539 0.655,9.273 v1(0.646,9.264)
SW1: R3.1 SW1.2 U1.28 | length 13.3
  Top Layer w0.254: U1.28 4.531,3.963 6.146,2.348 4.338,0.541 4.338,-1.166 R3.1@5.269,-2.097 ; 6.158,2.348 6.158,0.675 6.307,0.526 SW1.2
SW2: R4.1 SW1.4 U1.24 | length 21.2
  Top Layer w0.254: U1.24 3.328,1.885 3.328,0.612 3.547,0.393 3.547,-0.444 3.328,-0.663 3.328,-1.396 5.083,-3.151 5.083,-3.164 5.226,-3.307 R4.1 5.367,-3.179 5.367,-2.851 5.515,-2.702 6.412,-2.702 6.947,-2.167 11.301,-2.167 11.59,-1.878 11.971,-1.878 12.12,-1.729 12.12,-0.505 12.015,-0.4 12.015,0.01 12.12,0.115 12.12,1.56 10.868,2.812 9.258,2.812 9.019,2.573 SW1.4@9.215,2.573
SW3: R5.1 SW1.1 U1.29 | length 11.5
  Top Layer w0.254: U1.29 5.108,4.463 5.378,4.733 v1(5.39,4.733) 5.39,5.348 5.839,5.797 5.839,5.799 6.939,6.899 7.695,6.899 8.151,6.443
  Bottom Layer w0.254: v1(5.279,-0.867) 5.279,4.61 5.39,4.721 v1(5.39,4.733)
USB+: CH1.1 typec.6 typec.8 | length 10.1
  Top Layer w0.254: typec.8 -8.013,-5.544 -7.381,-5.544 -7.232,-5.396 -7.232,-4.739 -7.381,-4.59 -7.641,-4.59 typec.6@-7.667,-4.564 ; typec.6 -7.924,-4.567 -7.901,-4.59 -7.67,-4.59 v1(-7.67,-4.567)
  Bottom Layer w0.254: v1(-7.67,-4.567) -5.616,-6.621 -4.715,-6.621 -4.061,-7.275 v1(-1.147,-7.275)
USB-: CH1.2 typec.5 typec.7 | length 10.2
  Top Layer w0.254: typec.7 -8.059,-5.044 -8.765,-5.044 -8.913,-4.896 -8.913,-4.239 -8.765,-4.09 -8.059,-4.09 typec.5 ; CH1.2@-1.917,-7.779 v1(-1.915,-7.778)
  Bottom Layer w0.254: v1(-8.393,-5.067) -6.365,-7.096 -4.811,-7.096 -4.129,-7.778 v1(-1.915,-7.778)
USB_DET: R7.2 R8.1 U1.10 | length 14.1
  Top Layer w0.254: R7.2 -12.66,4.193 -11.732,4.193 -11.498,4.428 -11.498,4.474 -11.325,4.647 -11.325,4.66 -11.182,4.803 v1(-11.169,4.803) ; v1@-9.356,6.018 -8.752,5.415 -8.752,4.508 -8.677,4.432 v1(-8.677,4.42) ; v1(-4.049,3.818) -4.036,3.818 -3.682,3.463 U1.10
  Bottom Layer w0.254: v1(-11.169,4.803) -11.169,5.943 -11.02,6.092 -10.596,6.092 -10.53,6.027 v1(-9.364,6.027) ; v1(-8.677,4.42) -8.059,4.42 -7.734,4.095 -7.734,3.967 -7.463,3.696 -5.136,3.696 -5.014,3.818 v1(-4.049,3.818)
Vbat+: Battery.2 Battery.3 Q1.3 R6.1 R13.2 RTC1.9 U2.3 | length 43.6
  Top Layer w0.254: R6.1@-11.602,8.627 v1(-11.53,8.554) ; RTC1.9 -6.027,5.81 -6.027,5.03 -5.846,4.849 -5.04,4.849 -4.803,4.612 v1(-4.791,4.612) ; Q1.3 -4.867,-6.562 -3.909,-5.604 -3.907,-5.604 -3.789,-5.486 U2.3 U2.3@-3.789,-5.153
  Bottom Layer w0.254: v1(-13.76,6.853) -13.34,6.853 Battery.2@-13.32,6.833 ; Battery.3@-12.82,10.413 -12.792,10.386 -12.792,9.817 v1(-11.53,8.554) -11.539,8.545 -12.269,8.545 -12.418,8.397 -12.418,7.655 -12.92,7.153 -13,7.153 Battery.2@-13.32,6.833 ; v1(-4.791,4.612) -5.303,4.1 -6.416,4.1 -6.893,4.577 -7.258,4.577 -7.537,4.856 -7.537,4.968 -8.043,5.474 -8.548,5.474 ; v1(-0.755,-1.547) 0.1,-2.402 0.1,-5.888 -0.049,-6.037 -1.399,-6.037 -2.295,-5.141 v1(-3.807,-5.141) -6.34,-2.608 -6.34,-0.267 -8.03,1.424 -8.03,2.076 -9.279,3.325 -9.279,3.473 -9.54,3.734 -9.54,4.122 -9.469,4.193 -9.469,4.302 -9.01,4.761 -9.01,4.924 -8.548,5.386 -8.548,5.474 ; Battery.2@-13.32,6.833 -12.19,5.704 -11.98,5.704 -11.179,6.504 -9.167,6.504 -8.887,6.225 -8.887,5.623 -8.739,5.474 -8.548,5.474
pads on no net: B1.4 B1.11 BUZZER.3 RTC1.3 RTC1.10 RTC1.11 SW1.5 SW1.6 SW1.7 SW1.8 typec.3 typec.4 typec.9 typec.10 typec.13 typec.14 typec.15 typec.16 U1.5 U1.6 U1.7 U1.8 U1.25 U1.26 U1.27 U1.30 U1.31 U1.32 U1.33 U1.34 U1.44 U1.45 U1.47 U1.48 U3.4
copper on no net:
  other v3: -11.49,-10.987 11.49,-10.987 -11.49,10.987 11.49,10.987

## Polygon pours and split planes (outlines as drawn)
GND on Top Layer "GND_L01_P000" (solid, remove dead copper, pour order 0): -17.43,18.025 -17.43,-16.644 4.162,-16.644 20.964,-16.644 20.964,-2.895 20.964,-1.435 20.964,18.025
GND on Bottom Layer "GND_L02_P002" (solid, remove dead copper, pour order 2): -18.748,18.403 -18.748,-16.158 19.29,-16.158 20.72,-16.158 20.721,17.6 20.72,18.403

## Keep-outs
Keep-Out Layer:
  lines w0.1: -14.841,-0.107 -14.841,9.702 ; -14.841,9.662 cw(c-12.181,9.68) -12.679,12.293 ccw(c-13.847,20.666) -10.783,12.787 ccw(c-11.694,15.218) -9.599,13.684 cw(c-6.428,10.986) -7.115,15.093 ; -14.838,-9.447 ccw(c-12.178,-9.465) -12.676,-12.078 cw(c-13.843,-20.451) -10.78,-12.572 cw(c-11.691,-15.003) -9.596,-13.469 ccw(c-6.425,-10.771) -7.111,-14.878 ; -7.115,15.083 7.132,15.083 cw(c6.445,10.976) 9.616,13.674 ccw(c11.711,15.208) 10.801,12.777 ccw(c13.864,20.656) 12.696,12.283 cw(c12.199,9.67) 14.859,9.652 ; -7.111,-14.887 7.132,-14.887 ; 7.132,-14.884 ccw(c6.445,-10.777) 9.616,-13.476 ; 7.531,13.413 -7.62,13.413 ccw(c-7.62,12.713) -7.62,12.013 7.621,12.013 ; 7.561,12.013 ccw(c7.561,12.713) 7.561,13.413 ; 7.604,-11.922 -7.547,-11.922 ccw(c-7.547,-12.622) -7.547,-13.322 7.694,-13.322 ; 7.634,-13.322 ccw(c7.634,-12.622) 7.634,-11.922 ; 9.619,-13.475 cw(c11.714,-15.009) 10.803,-12.577 cw(c13.866,-20.456) 12.699,-12.084 ; 12.696,-12.085 ccw(c12.199,-9.472) 14.859,-9.454 14.859,9.872

## Other copper
Top Layer:
  pour cut-out: 10.22,-10.904 ccw(c11.573,-10.904) 11.573,-12.257 ccw(c11.573,-10.904) 12.926,-10.904 ccw(c11.573,-10.904) 11.573,-9.551 ccw(c11.573,-10.904)
  pour cut-out: -12.903,-11.054 ccw(c-11.55,-11.054) -11.55,-12.407 ccw(c-11.55,-11.054) -10.197,-11.054 ccw(c-11.55,-11.054) -11.55,-9.701 ccw(c-11.55,-11.054)
  pour cut-out: 15.022,11.543 14.75,11.543 8.121,11.543 8.323,-10.127 14.909,-10.127
Bottom Layer:
  pour cut-out: 10.22,-10.904 ccw(c11.573,-10.904) 11.573,-12.257 ccw(c11.573,-10.904) 12.926,-10.904 ccw(c11.573,-10.904) 11.573,-9.551 ccw(c11.573,-10.904)
  pour cut-out: -12.868,-11.038 ccw(c-11.515,-11.038) -11.515,-12.391 ccw(c-11.515,-11.038) -10.162,-11.038 ccw(c-11.515,-11.038) -11.515,-9.685 ccw(c-11.515,-11.038)
  pour cut-out: 14.24,11.313 7.34,11.313 7.34,-10.427 14.24,-10.427

## Silkscreen, mask and mechanical layers (free items; w line width, h text height)
Top Overlay:
  text "XY Watch" at 13,1.02 h0.7 r90
Bottom Overlay:
  text "-" at -7,10.503 h0.8
  text "+" at -13.84,10.46 h0.8
  text "-" at -4.01,10.363 h0.8 r180
  text "SCL" at -0.898,10.089 h0.8 r90
  text "SDA" at 0.35,10.089 h0.8 r90
  text "LNA IN" at 1.54,10.089 h0.8 r90
  text "IO19" at 2.98,10.089 h0.8 r90
  text "IO23" at 4.307,10.096 h0.8 r90
  text "3v3" at -2.16,10.063 h0.8 r90
  text "-" at -12.103,7.68 h0.6
  text "+" at -12.22,6.543 h0.6
  text "SCL1" at -10.93,5.613 h0.6
  text "SDA1" at -10.9,4.573 h0.6
  text "2" at -0.019,1.086 h3
  text "1" at 0.32,1.093 h3
  text "Life" at 7.3,0.963 h0.6 r321.78
  text "XYWatch" at 7.67,-1.747 h0.6 r40.07
  text "XYWatch" at -1.22,-4.497 h0.6 r326.86
  text "Life" at 0.13,-9.357 h0.6 r53.09
  text "v1.0.5 / 2025-4-15" at -2.87,-11.277 h0.6
Top Paste:
  lines w0.1: -14.889,-13.157 -14.889,-9.447 ; -14.85,-11.206 -11.15,-11.197 11.18,-11.197 ; 11.199,-11.191 14.899,-11.182 ; 14.89,-13.587 14.89,-9.877
  lines w0.254: -3.291,-14.808 -3.291,-11.968 ; -0.009,-13.727 -0.009,12.013
Top Solder:
  text "XYWatch" at -7.68,13.814 h0.7
  text "XYWatch" at -7.451,-14.597 h0.7
Bottom Solder:
  text "XYWatch - Life" at 4.13,13.873 h0.6
Mechanical 1:
  drawing of 211 lines, arcs and shapes, not listed